# EAGLE board shieldv3 (EAGLE 8.7.0)
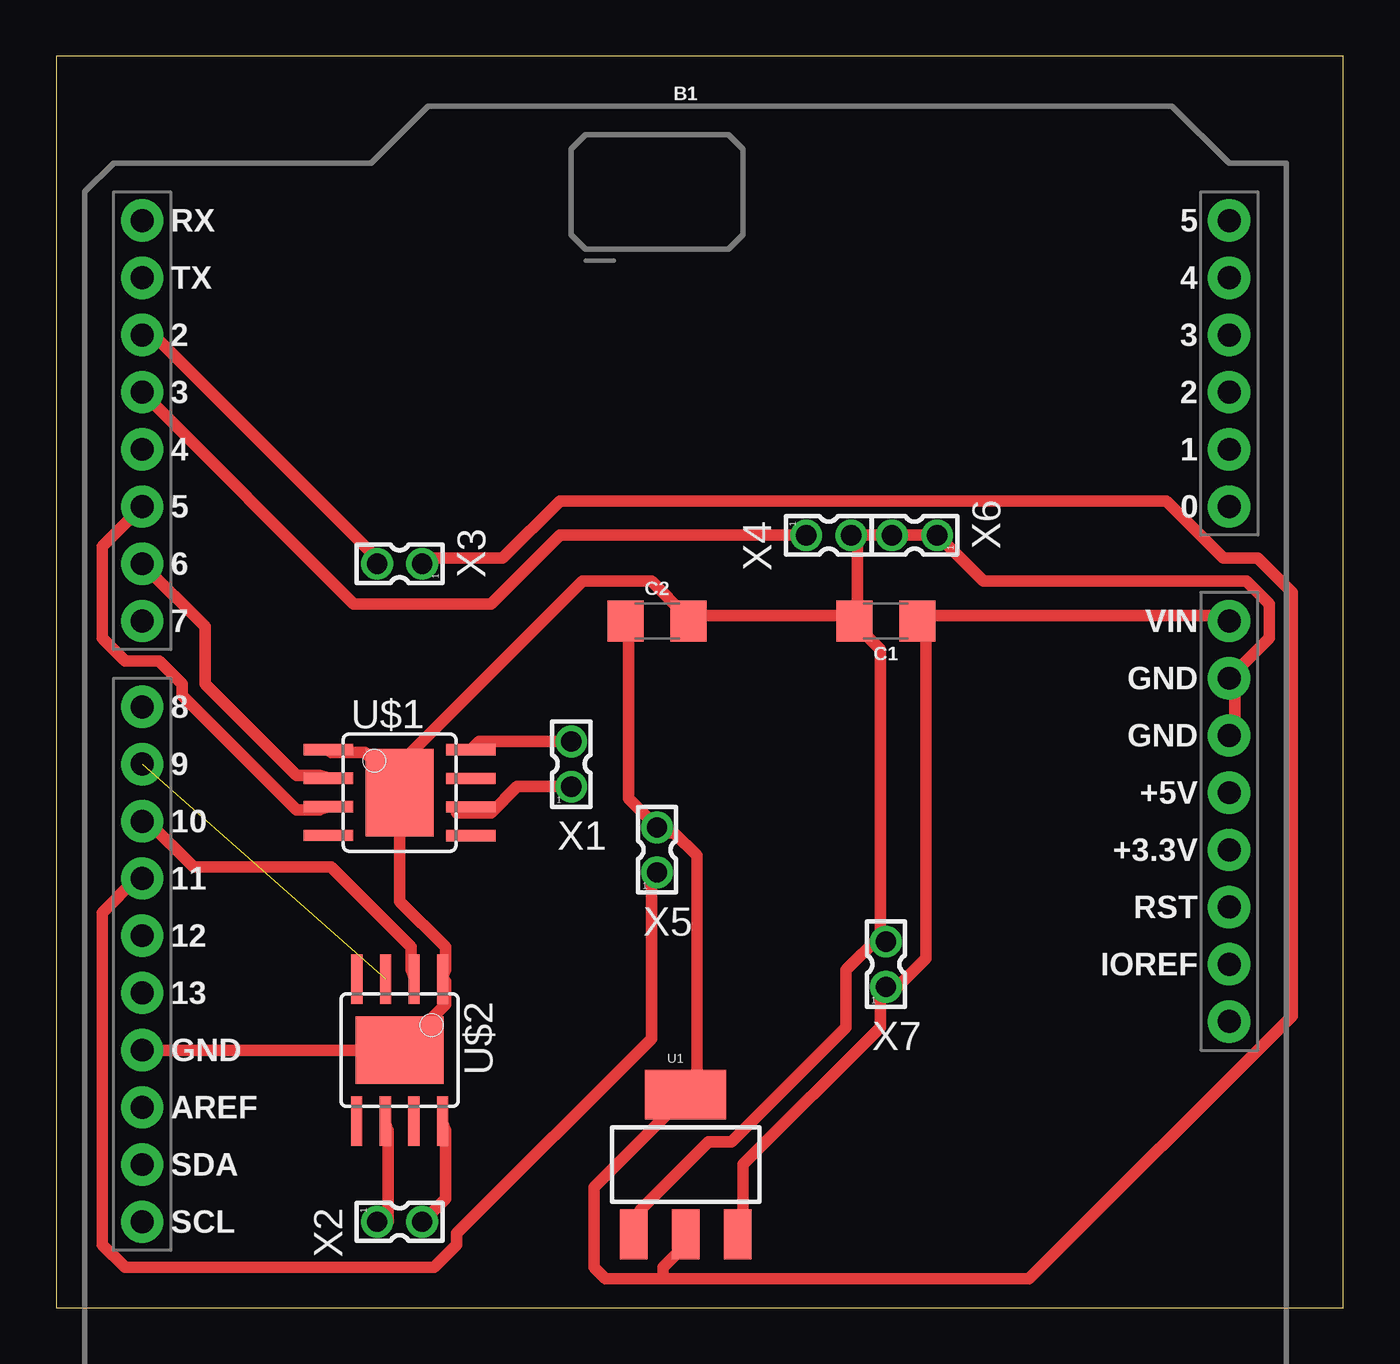
[diagram p0: board, top side]

Size 57.13 x 55.55 mm. Coordinates in mm from the lower left corner, seen from the top.
Outline: 0,0 57.13,0 57.13,55.55 0,55.55 0,0
Copper layers (1*16): Top 0.035mm / dielectric 1.5mm / Bottom 0.035mm
Design rules "default *": minimum track width 20mil, minimum drill 0.35mm, track to track 20mil, track to pad 20mil, pad to pad 20mil, via to via 20mil, smd to smd 20mil, copper to edge 40mil, drill to drill 6mil, minimum pad ring 10mil, minimum via ring 8mil, stop-mask expansion 4mil, vias tented up to drill 0mil, thermal gap 16mil

## Footprints (pad centres in the part's own frame; a part is rotated, then mirrored left to right if it is on the bottom)
UNO_R3_SHIELD = drill 1.016 pad 1.88: 3.3V 24.13,-2.54; 5V 24.13,0; A0 24.13,12.7; A1 24.13,15.24; A2 24.13,17.78; A3 24.13,20.32; A4 24.13,22.86; A5 24.13,25.4; AREF -24.13,-13.97; D2 -24.13,20.32; D3 -24.13,17.78; D4 -24.13,15.24; D5 -24.13,12.7; D6 -24.13,10.16; D7 -24.13,7.62; D8 -24.13,3.81; D9 -24.13,1.27; D10 -24.13,-1.27; D11 -24.13,-3.81; D12 -24.13,-6.35; D13 -24.13,-8.89; GND@0 24.13,2.54; GND@1 24.13,5.08; GND@2 -24.13,-11.43; IOREF 24.13,-7.62; NC 24.13,-10.16; RES 24.13,-5.08; RX -24.13,25.4; SCL -24.13,-19.05; SDA -24.13,-16.51; TX -24.13,22.86; VIN 24.13,7.62
1206 = smd 1.6 x 1.8: 1 -1.4,0; 2 1.4,0
SOT223 = smd 1.219 x 2.235: 1 -2.311,-3.099; 2 0,-3.099; 3 2.311,-3.099 | smd 3.6 x 2.2: 4 0,3.099
SOIC8_PAD = smd 0.5 x 2.2: 1 -1.905,-3.154; 2 -0.645,-3.154; 3 0.625,-3.154; 4 1.895,-3.154; 5 1.905,3.154; 6 0.635,3.154; 7 -0.635,3.154; 8 -1.905,3.154 | smd 3.886 x 2.997: GND 0,0
332-02 = drill 0.9 pad 1.27: 1 0,-1; 2 0,1

## Placement (x,y rotation side)
B1  ARDUINO_UNO_R3_SHIELDBASIC  [UNO_R3_SHIELD]  27.94,22.86 0 top
C1  10uF  [1206]  36.83,30.48 180 top
C2  10uF  [1206]  26.67,30.48 0 top
U1  [SOT223]  27.94,6.35 0 top
U$1  A4953-H-BRIDGE-MOTOR-DRIVER-PAD  [SOIC8_PAD]  15.24,22.86 270 top
U$2  A4953-H-BRIDGE-MOTOR-DRIVER-PAD  [SOIC8_PAD]  15.24,11.43 180 top
X1  332-02  [332-02]  22.86,24.13 0 top
X2  332-02  [332-02]  15.24,3.81 270 top
X3  332-02  [332-02]  15.24,33.02 90 top
X4  332-02  [332-02]  34.29,34.29 270 top
X5  332-02  [332-02]  26.67,20.32 0 top
X6  332-02  [332-02]  38.1,34.29 90 top
X7  332-02  [332-02]  36.83,15.24 0 top

## Library data of the parts
B1 = SparkFun-Boards
C1 C2 = SparkFun-Capacitors; PROD_ID: CAP-10057
U1 = fab; PROD_ID: VREG-08170
U$1 U$2 = fab
X1-X7 = con-garry

## Nets
+5V: C2.1 U1.2 U1.4 X3.1 X5.2
GND: B1.GND@0 B1.GND@1 B1.GND@2 C1.2 C2.2 U1.1 U$1.1 U$1.GND U$2.1 U$2.GND X4.2 X6.1 X6.2 X7.2
N$1: B1.D5 U$1.3
N$2: B1.D6 U$1.2
N$3: U$1.8 X1.2
N$4: B1.D10 U$2.2
N$5: U$1.6 X1.1
N$6: U$2.8 X2.2
N$7: U$2.6 X2.1
N$9: B1.D3 X4.1
N$10: B1.D2 X3.2
N$11: B1.D11 X5.1
N$12: B1.D13
N$13: B1.D9 U$2.3
VCC: B1.VIN C1.1 U1.3 X7.1

## Tracks (layer width: path | path; a pad name or v marks a point on that pad's centre or on a via)
+5V
  Top 0.508: C2.1 25.4,30.23 25.4,22.61 26.42,21.59 X5.2 26.92,21.08 27.43,21.08 28.45,20.07 28.45,10.41 27.94,9.91 U1.4 27.94,9.4 23.88,5.33 23.88,1.78 24.38,1.27 26.92,1.27 | 26.92,1.27 26.92,1.78 27.94,2.79 U1.2 | 26.92,1.27 43.18,1.27 54.86,12.95 54.86,31.75 53.34,33.27 51.82,33.27 49.28,35.81 22.35,35.81 19.81,33.27 16.26,33.27 X3.1
GND
  Top 0.508: 14.73,23.62 15.24,23.11 U$1.GND | 14.73,23.62 13.72,24.64 12.19,24.64 U$1.1 | B1.GND@2 U$2.GND 17.27,13.46 17.27,14.48 U$2.1 17.27,14.99 17.27,16 15.24,18.03 U$1.GND | 36.58,16.51 35.05,14.99 35.05,12.45 29.97,7.37 28.96,7.37 25.91,4.32 25.91,3.3 U1.1 | B1.GND@0 52.32,25.65 52.32,27.69 B1.GND@1 53.85,29.72 53.85,31.24 52.83,32.26 41.15,32.26 39.12,34.29 X6.1 X6.2 35.56,34.29 | C1.2 35.05,30.73 28.45,30.73 C2.2 27.94,30.73 26.42,32.26 23.37,32.26 14.73,23.62 | 35.56,34.29 35.56,30.73 C1.2 | 35.56,34.29 X4.2 | 36.58,16.51 36.58,29.21 35.56,30.23 C1.2 | 36.58,16.51 X7.2 | 14.73,23.62 U$1.GND
N$1
  Top 0.508: B1.D5 2.03,33.78 2.03,29.72 3.05,28.7 4.57,28.7 5.59,27.69 5.59,27.18 10.67,22.1 11.68,22.1 U$1.3
N$2
  Top 0.508: B1.D6 6.6,30.23 6.6,27.69 10.67,23.62 11.68,23.62 U$1.2
N$3
  Top 0.508: X1.2 18.76,25.13 U$1.8
N$4
  Top 0.508: U$2.2 15.75,14.99 15.75,16 12.19,19.56 6.1,19.56 4.06,21.59 B1.D10
N$5
  Top 0.508: X1.1 20.46,23.13 19.29,21.97 18.14,21.97 | 17.78,21.97 18.14,21.97 | 18.14,21.97 U$1.6
N$6
  Top 0.508: U$2.8 17.27,7.87 17.27,4.83 16.26,3.81 X2.2
N$7
  Top 0.508: U$2.6 14.73,7.87 14.73,3.81 X2.1
N$9
  Top 0.508: X4.1 22.35,34.29 19.3,31.24 13.21,31.24 B1.D3
N$10
  Top 0.508: X3.2 14.22,33.27 4.06,43.43 B1.D2
N$11
  Top 0.508: X5.1 26.42,19.05 26.42,11.94 17.78,3.3 17.78,2.79 16.76,1.78 3.05,1.78 2.03,2.79 2.03,17.53 3.56,19.05 B1.D11
N$13  (1 unrouted)
VCC
  Top 0.508: B1.VIN 51.82,30.73 38.61,30.73 C1.1 38.61,30.23 38.61,15.49 37.08,13.97 X7.1 36.58,13.97 36.58,12.45 30.48,6.35 30.48,3.3 U1.3